# Allegro board HUMAN_INTERFACE_FINAL.brd
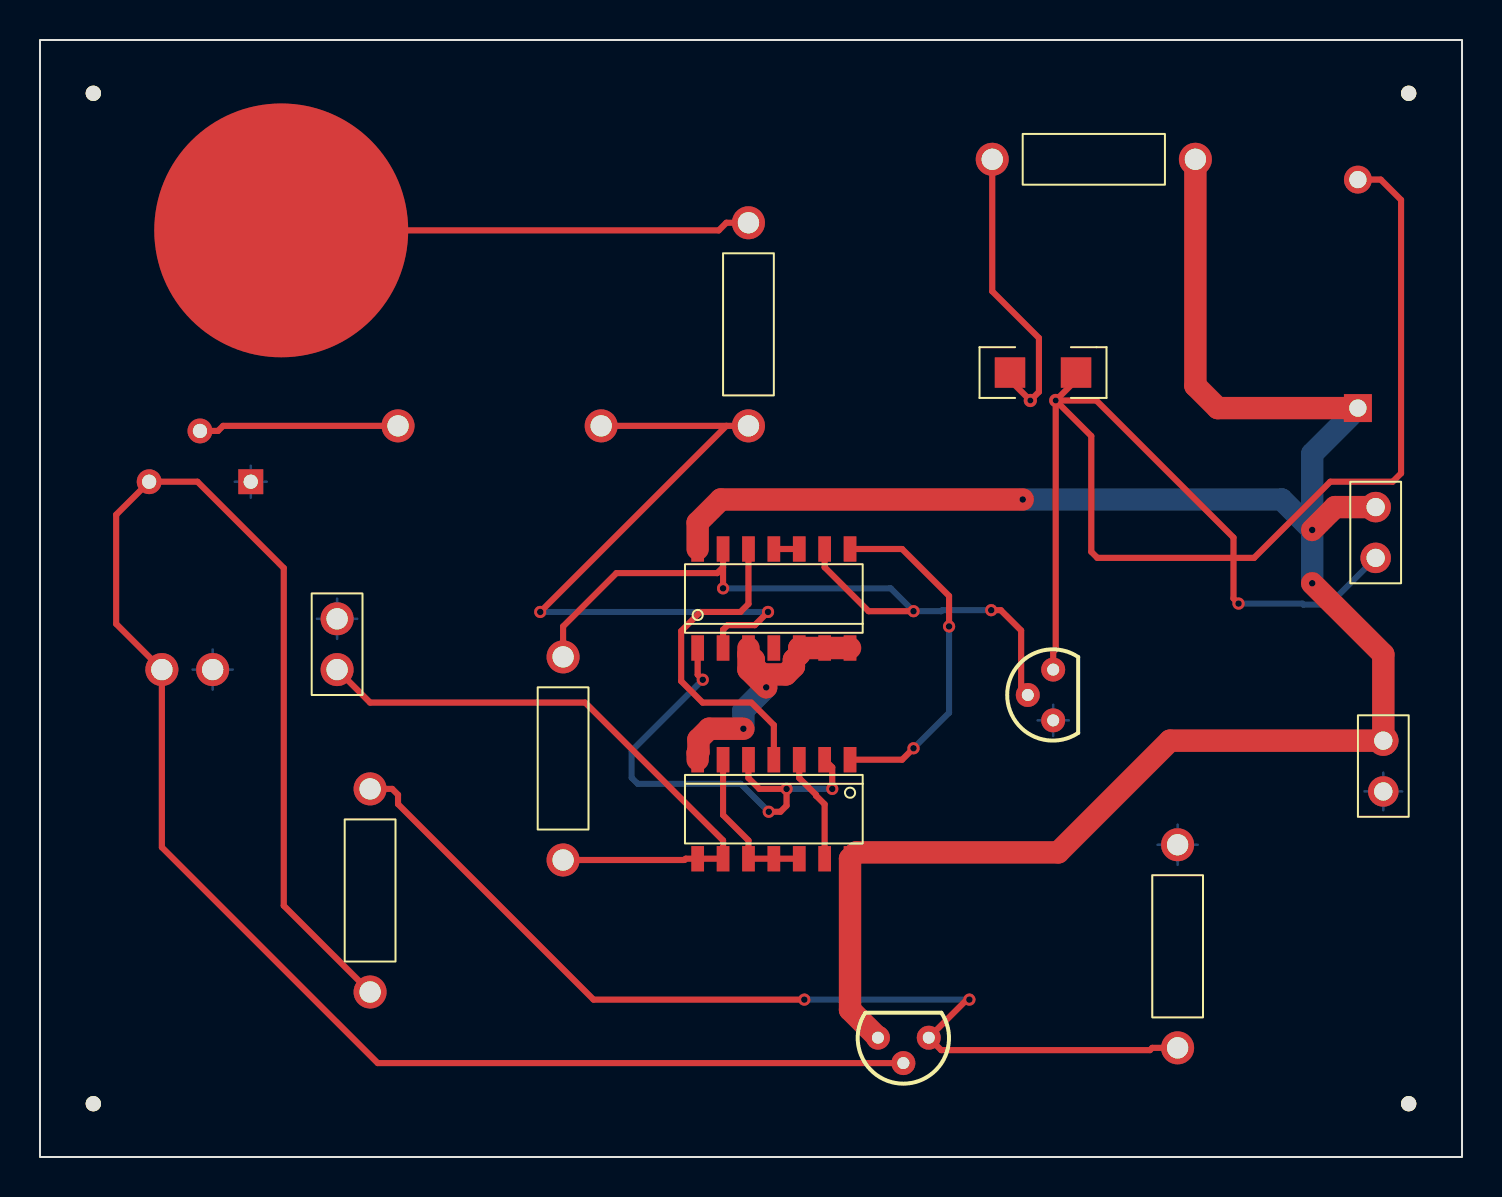
[diagram p0: board, top side]
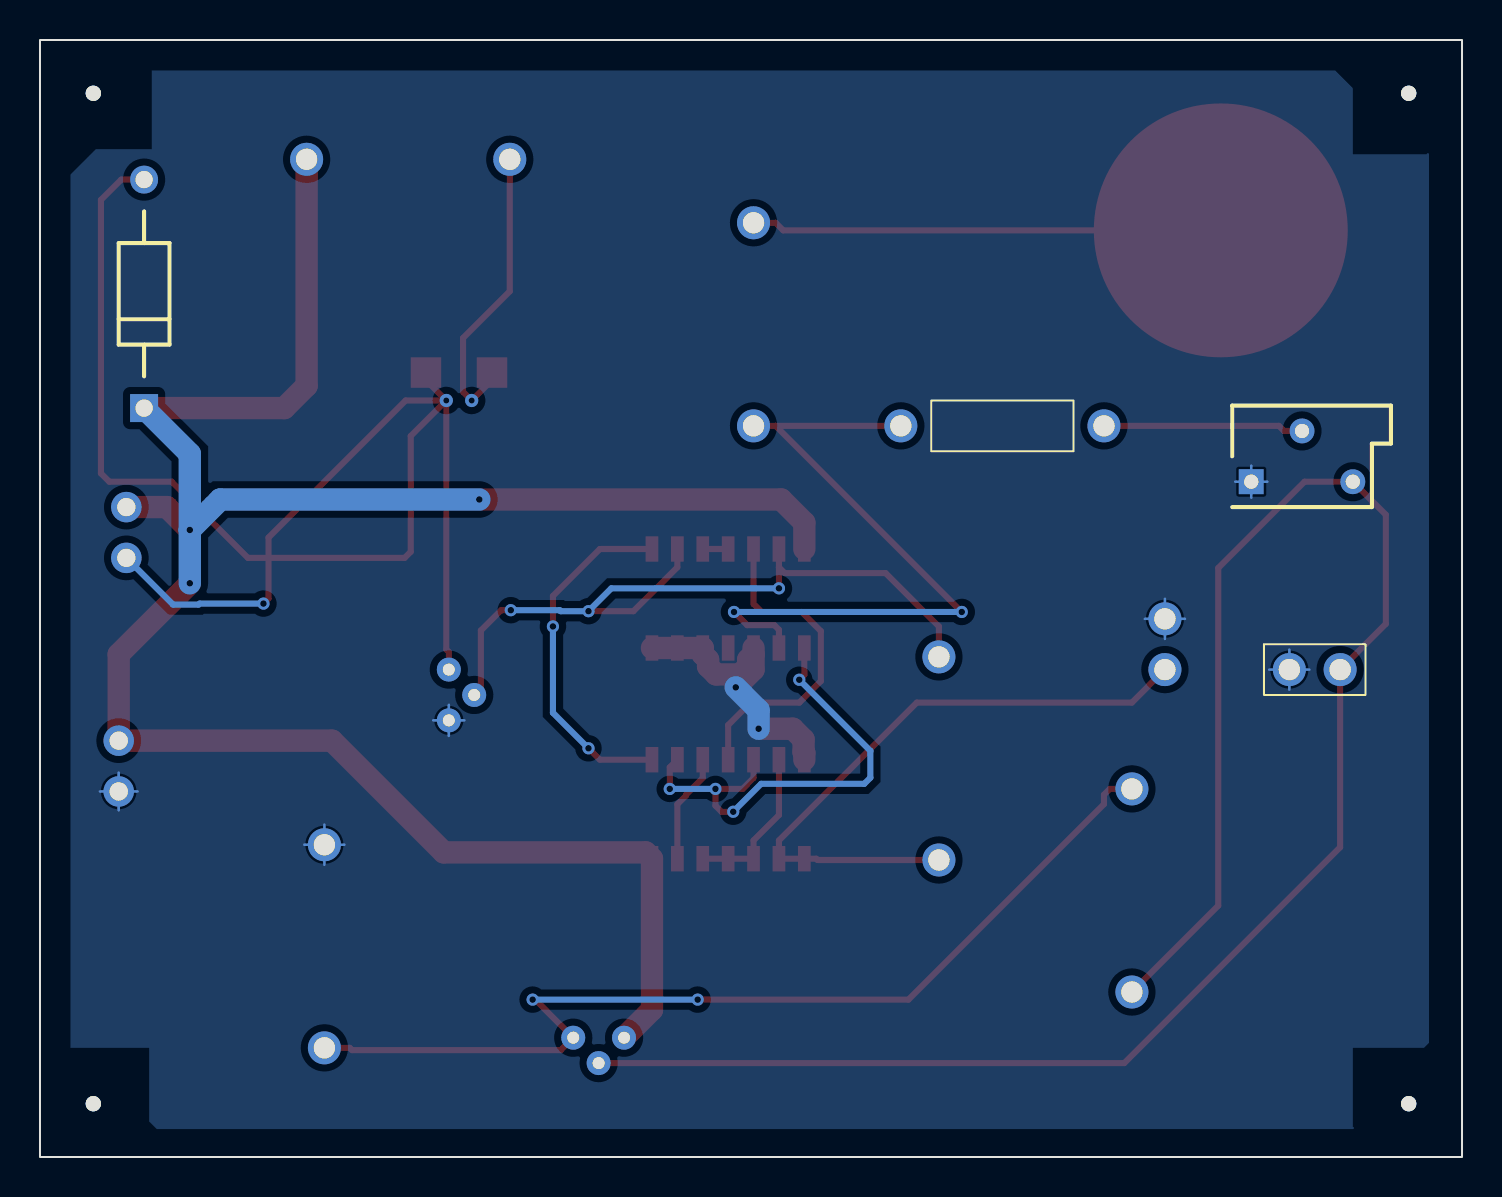
[diagram p1: board, bottom side, seen from below]

Outline 71.12 x 55.88 mm; copper layers: TOP, BOTTOM. Coordinates in mm from the lower left corner of the outline.
Outline path: rectangle 0,0 71.12,55.88

## Design rules (mm)
constraint set DEFAULT: min track width 0.127
nets with their own width: min track width 0.305; nets N00225 N00229 N00236 N00556 N00573 N00627 N00645 N00686 N00786 N01573 N02019 N02218 N04201 N08128 N024101
nets with their own width: min track width 1.118; nets 12V

## Placement (name value [footprint] x y rotation side)
C1  1u  [CAPCK05]  6.1 24.38 90 bottom
C2  1u  [CAPCK05]  14.86 24.38 0 top
D1  D1N4148  [DAX2DO35]  65.91 48.89 90 bottom
D2  LED  [1206RF_WV_12D]  50.16 39.24 0 top
J1  CON2  [JUMPER2]  67.18 20.83 270 top
K1  Relay  [JUMPER2]  66.8 32.51 270 top
NOREF  -  [unnamed]  2.67 53.21 0 top
NOREF#2  -  [unnamed]  2.67 2.67 0 top
NOREF#3  -  [unnamed]  68.45 2.67 0 top
NOREF#4  -  [unnamed]  68.45 53.21 0 top
Q1  2N7000  [TO-92L]  50.67 23.11 90 top
R1  1M  [RES400]  35.43 46.74 180 top
R2  100M  [RES400]  17.91 36.58 90 bottom
R3  100K  [VRES10]  10.54 33.78 180 bottom
R4  220  [RES400]  16.51 8.25 0 top
R5  330  [RES400]  56.9 5.46 0 top
R6  1K  [RES400]  57.78 49.91 90 top
R7  1M  [RES400]  26.16 14.86 0 top
U1  74HC02  [SOIC14]  36.7 27.94 90 top
U2  74HC02  [SOIC14]  36.7 17.4 270 top
U3  LM317L/TO92  [TO-92L]  43.18 5.97 180 top
UNK1  COIN-SIZED PAD  [MONEDA]  12.06 46.36 0 top

## Library data of the parts
C1 = C: Tolerance: ***; User Part Number: ***
C2 = CAP: Tolerance: ***; User Part Number: ***
D1 = 1N4148
D2 = LED
J1 = CON2_1: User Part Number: ***
K1 = CON2: User Part Number: ***
Q1 = 2N7000
R1 R2 R4-R7 = R: Tolerance: ***; User Part Number: ***
R3 = POT
U1 U2 = 74HC02_19: Tolerance: ***; User Part Number: ***
U3 = LM317L/TO92_11
UNK1 = COIN_1

## Footprints (pads in the part's own frame, mm; a bottom-side part is the same pattern mirrored in y, then rotated)
1206RF_WV_12D
  rect 1.524x1.524 smd: 1(-1.651,0) 2(1.651,0)
CAPCK05
  round 1.651 hole 1.067: 1(0,0) 2(0,2.54)
DAX2DO35
  round 1.397 hole 0.864: 1(0,0)
  rect 1.397x1.397 hole 0.864: 2(-11.43,0)
JUMPER2
  round 1.524 hole 0.914: 1(0,0) 2(2.54,0)
MONEDA
  round 12.7 smd: 1(0,0)
RES400
  round 1.651 hole 1.067: 1(0,0) 2(0,10.16)
SOIC14
  rect 1.27x0.635 smd: 1(-2.477,3.81) 2(-2.477,2.54) 3(-2.477,1.27) 4(-2.477,0) 5(-2.477,-1.27) 6(-2.477,-2.54) 7(-2.477,-3.81) 8(2.477,-3.81) 9(2.477,-2.54) 10(2.477,-1.27) 11(2.477,0) 12(2.477,1.27) 13(2.477,2.54) 14(2.477,3.81)
TO-92L
  round 1.2 hole 0.6: 1(-1.27,0) 2(0,1.27) 3(1.27,0)
unnamed
  round 0.762 hole 3.251 unplated: (0,0)
VRES10
  rect 1.245x1.245 hole 0.711: 1(0,0)
  round 1.245 hole 0.711: 2(2.54,2.54) 3(5.08,0)

## Nets
12V: D1.2 J1.1 K1.1 R6.1 U1.14 U2.14 U3.3
GND_ARROW: C1.2 C2.2 J1.2 Q1.1(SOURCE) R3.1 R5.2 U1.3 U1.5 U1.6 U1.7 U2.7
N00225: R1.1 UNK1.1
N00229: R1.2 R2.2 U1.2
N00236: R2.1 R3.2(T)
N00556: U1.1 U2.2 U2.5
N00573: U2.6 U2.10 U2.11 U2.12
N00627: U2.3 U2.13(Y)
N00645: U1.8 U2.1
N00686: U1.12 U2.4
N00786: C2.1 R7.1 U2.8 U2.9
N01573: Q1.2 R7.2 U1.9 U1.13(Y)
N02019: C1.1 R3.3 R4.1 U3.2(VOUT)
N02218: D1.1 D2.2(CATHODE) K1.2 Q1.3
N04201: R4.2 R5.1 U3.1
N08128: U1.10 U1.11
N024101: D2.1 R6.2

Pads without a net: U1 4

## Via types
v1: diameter 0.61, hole 0.33, TOP to BOTTOM, 19 vias
v2: diameter 0.66, hole 0.305, TOP to BOTTOM, 2 vias

## Routing (per net, layer and track width the routed paths; a pad name or vN(x,y) marks a point on that pad's centre or on a via; arc(x,y) is an arc through that point)
12V: length 114.4
  TOP w1.118: U3.3 40.51,7.37 U2.14 40.83,15.24 50.93,15.24 56.51,20.83 J1.1 67.18,25.15 v1(63.63,28.7) ; D1.2 58.9,37.47 57.78,38.58 R6.1 ; K1.1 64.77,32.51 v1(63.63,31.37) ; v1(49.15,32.89) 34.05,32.89 32.89,31.74 U1.14
  BOTTOM w1.118: v1(63.63,31.37) 63.63,35.18 D1.2 ; v1(63.63,31.37) v1(63.63,28.7) ; v1(63.63,31.37) 62.1,32.89 v1(49.15,32.89)
GND_ARROW: length 37.1
  TOP w1.118: 35.43,25.15 35.43,24.38 v1(36.32,23.5) ; 35.43,25.15 U1.3 ; 35.43,25.15 35.7,24.88 35.7,24.54 36.1,24.14 37.3,24.14 37.71,24.54 37.71,24.88 37.97,25.15 U1.5 U1.6 U1.7 ; U2.7 32.89,20.22 32.93,20.26 32.93,20.89 33.47,21.42 v1(35.18,21.42)
  BOTTOM w0.127: 13.86,26.92 C2.2 ; C2.2 14.86,27.93 ; C2.2 14.86,25.92 ; C2.2 15.86,26.92 ; Q1.1 51.45,21.84 ; Q1.1 50.67,21.07 ; Q1.1 49.89,21.84 ; Q1.1 50.67,22.62 ; R5.2 57.9,15.62 ; R5.2 56.9,16.62 ; R5.2 55.89,15.62 ; R5.2 56.9,14.62 ; C1.2 9.64,24.38 ; C1.2 8.64,23.38 ; C1.2 8.64,25.39 ; C1.2 7.63,24.38 ; R3.1 10.54,34.58 ; R3.1 10.54,32.98 ; R3.1 9.74,33.78 ; R3.1 11.34,33.78 ; 67.18,17.35 J1.2 ; J1.2 68.12,18.29 ; J1.2 66.24,18.29 ; J1.2 67.18,19.23
  BOTTOM w1.118: v1(36.32,23.5) 35.18,22.35 v1(35.18,21.42)
N00225: length 23.5
  TOP w0.305: UNK1.1 33.95,46.36 34.33,46.74 R1.1
N00229: length 35.5
  TOP w0.305: U1.2 34.16,26.38 34.39,26.61 35.75,26.61 v1(36.41,27.27) ; 34.33,36.58 v1(25.02,27.27) ; 34.33,36.58 R1.2 ; 34.33,36.58 R2.2
  BOTTOM w0.305: v1(25.02,27.27) v1(36.41,27.27)
N00236: length 10
  TOP w0.305: R3.2 8.9,36.32 9.16,36.58 R2.1
N00556: length 24.4
  TOP w0.305: v1(39.62,18.42) 39.62,19.49 U2.2 ; v1(33.15,23.88) 32.89,24.13 U1.1 ; U2.5 35.43,18.96 35.98,18.42 v1(37.34,18.42) 37.34,17.58 37.03,17.27 v1(36.45,17.27)
  BOTTOM w0.305: v1(36.45,17.27) 35.05,18.67 29.9,18.67 29.59,18.97 29.59,20.32 v1(33.15,23.88) ; v1(37.34,18.42) v1(39.62,18.42)
N00573: length 8
  TOP w0.305: U2.12 U2.11 U2.10 35.43,15.84 34.16,17.11 U2.6
N00627: length 5.5
  TOP w0.305: U2.3 37.97,18.96 38.81,18.12 38.81,18.08 39.24,17.65 U2.13
N00645: length 17.7
  TOP w0.305: v1(45.47,26.54) 45.47,28.07 43.12,30.42 U1.8 ; U2.1 43.12,19.88 v1(43.69,20.45)
  BOTTOM w0.305: v1(45.47,26.54) 45.47,22.22 v1(43.69,20.45)
N00686: length 16.5
  TOP w0.305: U2.4 36.7,21.61 35.58,22.73 33.14,22.73 32.07,23.81 32.07,26.31 33.03,27.27 35.03,27.27 35.43,27.67 U1.12
N00786: length 31.8
  TOP w0.305: R7.1 32.23,14.86 32.3,14.92 U2.8 U2.9 34.16,15.84 27.27,22.73 16.51,22.73 C2.1
N01573: length 38.2
  TOP w0.305: U1.9 39.24,29.5 41.44,27.31 v1(43.69,27.31) ; U1.13 34.16,29.5 ; 34.16,29.5 v1(34.16,28.45) ; 34.16,29.5 33.87,29.21 28.83,29.21 26.16,26.54 R7.2 ; Q1.2 49.07,23.45 49.07,26.34 48.05,27.36 v1(47.57,27.36)
  BOTTOM w0.305: v1(47.57,27.36) 45.13,27.36 45.08,27.31 v1(43.69,27.31) 42.54,28.45 v1(34.16,28.45)
N02019: length 93.1
  TOP w0.305: R4.1 12.19,12.57 12.19,29.46 7.87,33.78 5.46,33.78 ; 5.46,33.78 3.81,32.13 3.81,26.67 C1.1 6.1,15.49 16.89,4.7 43.18,4.7 ; 5.46,33.78 5.46,33.91
N02218: length 80.3
  TOP w0.305: v1(59.94,27.69) 59.69,27.94 59.69,30.99 52.83,37.85 v2(50.8,37.85) ; D1.1 67.06,48.89 68.07,47.88 68.07,34.2 67.65,33.78 64.53,33.78 60.72,29.97 52.88,29.97 52.58,30.28 52.58,36.07 v2(50.8,37.85) ; D2.2 51.82,38.86 v2(50.8,37.85) ; Q1.3 50.67,25.26 50.8,25.39 v2(50.8,37.85)
  BOTTOM w0.305: K1.2 64.47,27.64 63.19,27.64 63.13,27.69 v1(59.94,27.69)
N04201: length 50.3
  TOP w0.305: 16.51,18.42 17.61,18.42 17.91,18.12 17.91,17.65 27.69,7.87 v1(38.23,7.87) ; 57.02,5.46 R5.1 55.63,5.46 55.51,5.35 45.07,5.35 U3.1 46.35,7.87 v1(46.48,7.87)
  BOTTOM w0.305: v1(38.23,7.87) v1(46.48,7.87)
N08128: length 1.3
  TOP w0.305: U1.10 U1.11
N024101: length 15
  TOP w0.305: R6.2 47.62,43.31 49.96,40.97 49.96,38.28 v2(49.53,37.85) 48.51,38.86 D2.1

## Copper pours and planes (outline as drawn; the poured copper is in the pictures)
GND_ARROW on BOTTOM: 1.65,50.29 1.65,5.72 1.9,5.46 5.46,5.46 5.46,1.52 5.33,1.4 65.28,1.4 65.66,1.78 65.66,5.46 69.6,5.46 69.6,49.15 68.33,50.42 65.53,50.42 65.53,54.36 6.35,54.36 5.46,53.47 5.46,50.17 1.78,50.17
